# Altium PCB ver_3.PcbDoc
Units mm, origin at the board's own origin, x right, y up, seen from the top; angles counter-clockwise.
Board outline 72 x 119 mm, 2 copper layers (Top Layer, Bottom Layer); 60 components, 48 nets, 255 pads, 36 vias.
Unrouted connection lines stored in the file: 4.
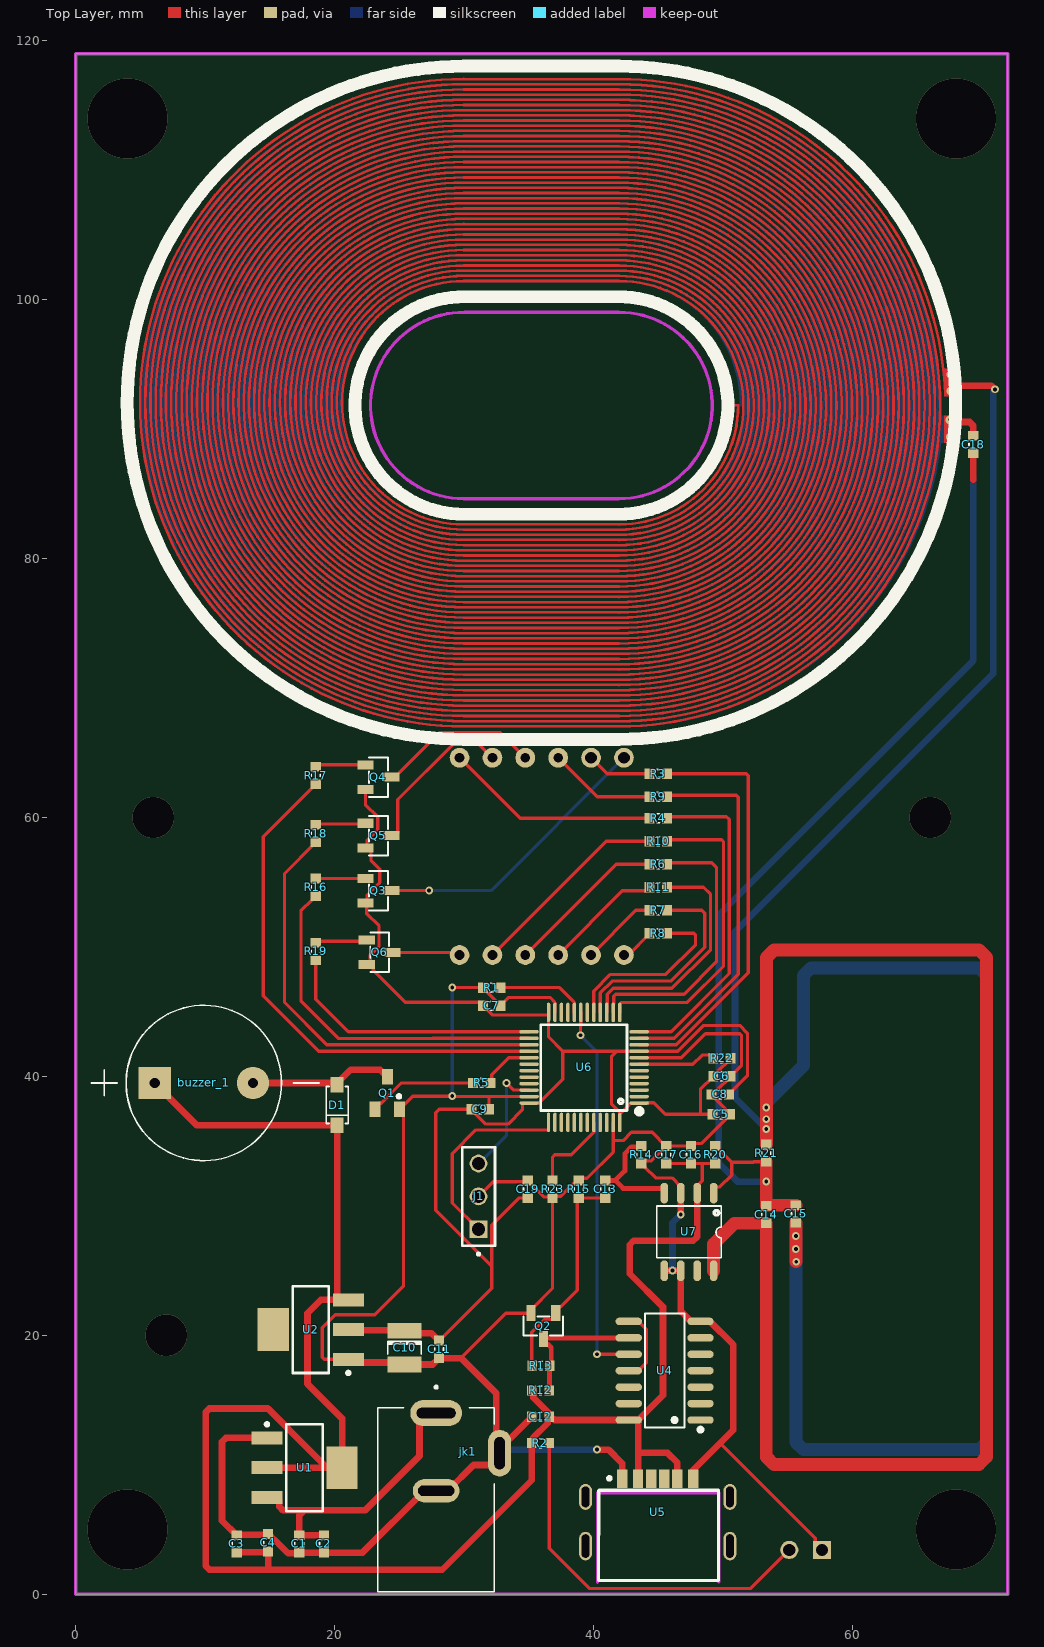
[diagram p0: Top Layer view]
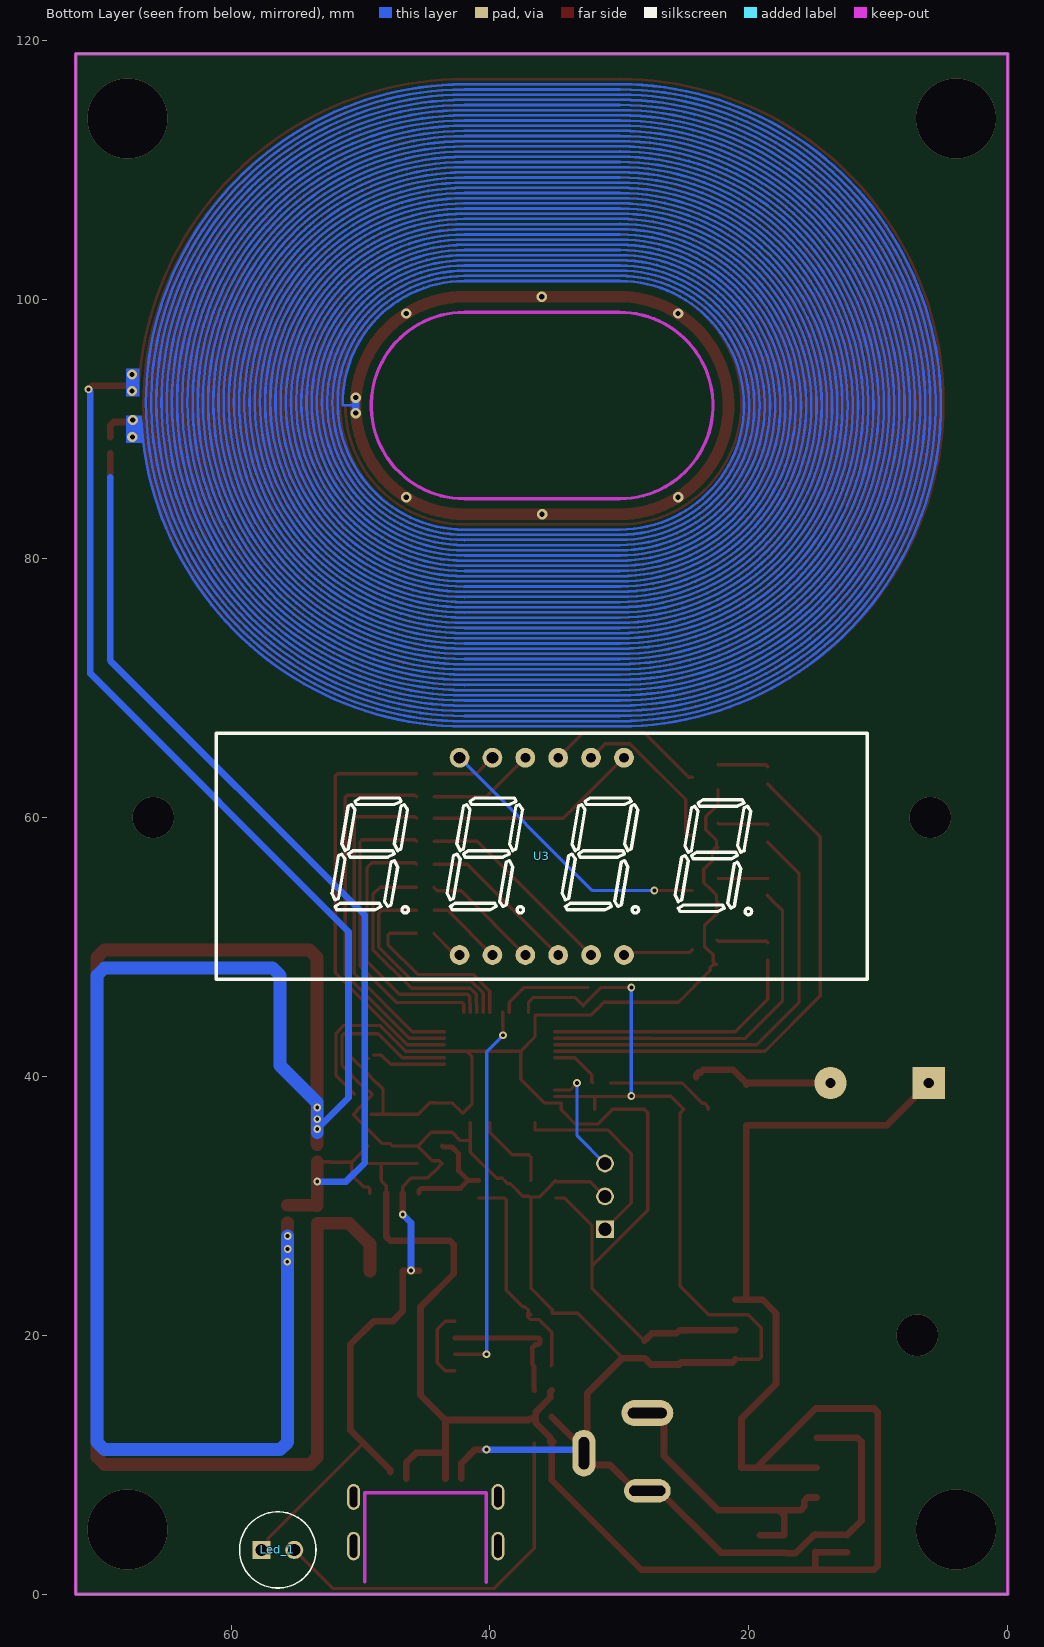
[diagram p1: Bottom Layer view, seen from below]
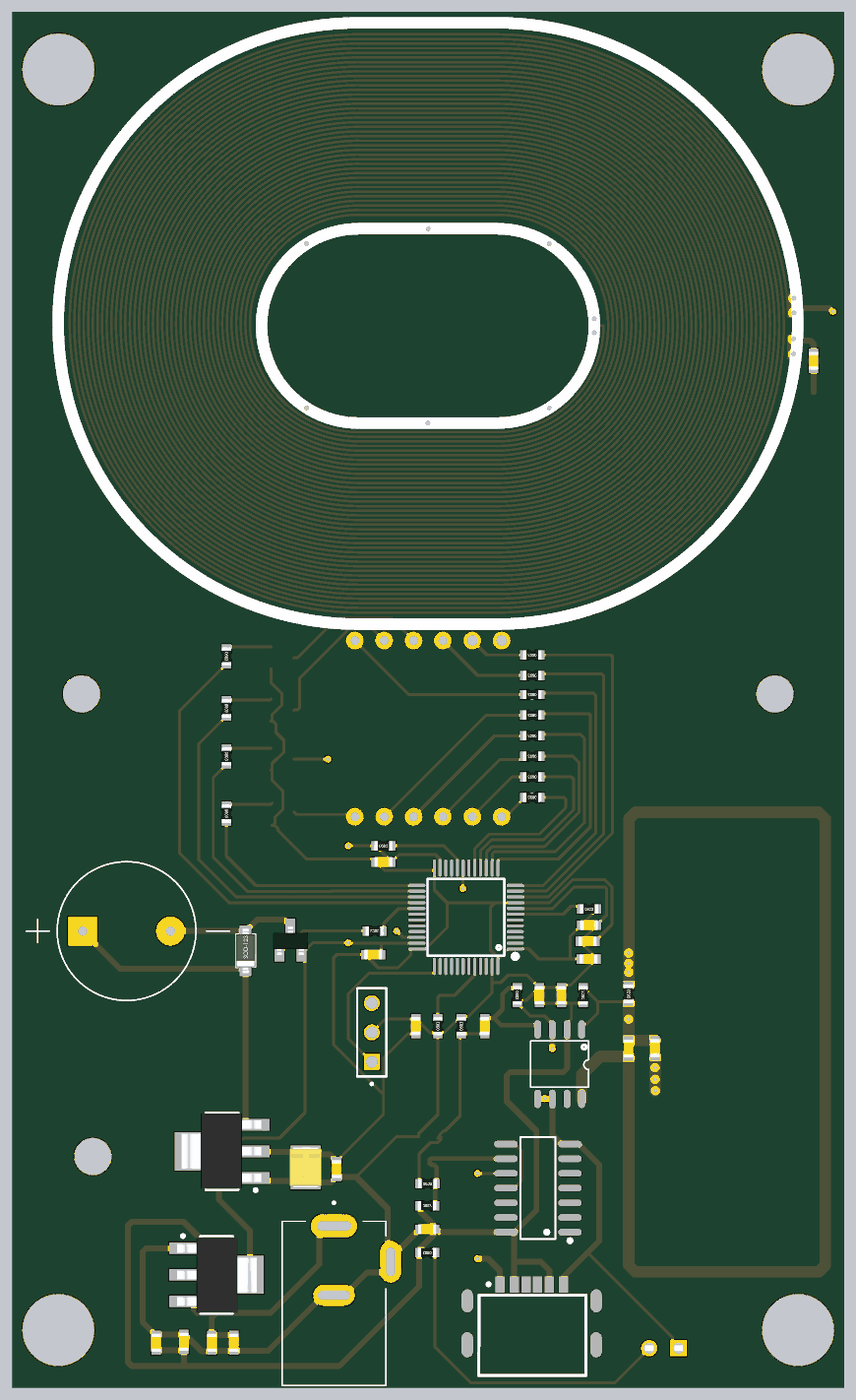
[diagram p2: 3D render of the assembled board from above, using the file's embedded part models]

## Layer stack, top to bottom
Top Solder: solder mask 0.0102, Solder Resist, Dk 3.5
Top Layer: signal copper 0.0356
Dielectric 1: dielectric 0.32, FR-4, Dk 4.8
Bottom Layer: signal copper 0.0356
Bottom Solder: solder mask 0.0102, Solder Resist, Dk 3.5

## Board outline
0,0 72,0 72,118.999 0,119

## Design rules (kind name [scope] priority, off if disabled: settings)
Clearance [All] p1: gap=0.2 ignorepadtopadclearanceinfootprint=FALSE
PolygonConnect [All] p1: connectstyle=Relief reliefconductorwidth=0.254 reliefentries=4 polygonreliefangle="90 Angle" airgapwidth=0.254
RoutingVias [All] p1: holewidth=0.711 width=1.27 viastyle="Through Hole" minholewidth=0.3 minwidth=0.6 maxholewidth=0.3 maxwidth=0.6
SolderMaskExpansion [All] p1: expansion=0.102 istentingtop=FALSE
Width [All] p1: maxlimit=1 minlimit=0.254 preferedwidth=0.508
30 further rules are at their usual default settings.

## Components (designator, comment, footprint, x,y, rotation, side; value= is the part's Value field where it differs from the comment)
buzzer_1 "buzzer_12mm" buzzer_12mm 9.896,39.497 r0 top
C1 "10uF" CN-SMD-0603 17.272,3.897 r90 top
C2 "100nF" CN-SMD-0603 19.177,3.897 r90 top
C3 "10uF" CN-SMD-0603 12.446,3.897 r270 top
C4 "100uF" CN-SMD-0603 14.859,3.977 r270 top
C5 "104" CN-SMD-0603 49.871,37.084 r0 top
C6 "104" CN-SMD-0603 49.911,40.005 r0 top
C7 "104" CN-SMD-0603 32.131,45.466 r180 top
C8 "104" CN-SMD-0603 49.784,38.608 r180 top
C9 "104" CN-SMD-0603 31.242,37.465 r180 top
C10 "226J" C_Tanta_3528 25.4,19.05 r270 top
C11 "10uF" CN-SMD-0603 28.067,18.923 r90 top
C12 "104" CN-SMD-0603 35.901,13.716 r0 top
C13 "150pF" CN-SMD-0603 40.894,31.282 r90 top
C14 "100pF" CN-SMD-0603 53.34,29.337 r90 top
C15 "1nF" CN-SMD-0603 55.626,29.377 r90 top
C16 "104" CN-SMD-0603 47.524,33.949 r270 top
C17 "104" CN-SMD-0603 45.619,33.949 r270 top
C18 "1nF" CN-SMD-0603 69.342,88.813 r270 top
C19 "104" CN-SMD-0603 34.925,31.282 r90 top
D1 "1N4148" SOD-123 20.153,37.735 r270 top value=1N4007
J1 "JP3x1" JP3x1 31.115,26.289 r90 top
jk1 "jack dc" "jack dc" 27.843,14.001 r270 top
Led_1 "led_5mm" led_5mm 56.388,3.429 r180 bottom
Q1 "AO3400" SOT23B 24.073,38.72 r0 top value=C1815
Q2 "J3Y" j3y -385.435,-409.879 r90 top
Q3 "2TY" 2TY 453.981,-367.208 r180 top
Q4 "2TY" 2TY 453.981,-358.445 r180 top
Q5 "2TY" 2TY 453.981,-362.956 r180 top
Q6 "2TY" 2TY 454.075,-371.973 r180 top
R1 "10K" RES-SMD-0603 32.131,46.863 r0 top value="R1/4W - 1K"
R2 "1K" RES-SMD-0603 35.901,11.684 r180 top value="R1/4W - 1K"
R3 "330" RES-SMD-0603 44.998,63.373 r180 top value="R1/4W - 1K"
R4 "330" RES-SMD-0603 44.998,59.944 r180 top value="R1/4W - 1K"
R5 "1K" RES-SMD-0603 31.369,39.497 r180 top value="R1/4W - 1K"
R6 "330" RES-SMD-0603 44.998,56.388 r180 top value="R1/4W - 1K"
R7 "330" RES-SMD-0603 44.998,52.832 r180 top value="R1/4W - 1K"
R8 "330" RES-SMD-0603 44.998,51.054 r180 top value="R1/4W - 1K"
R9 "330" RES-SMD-0603 44.998,61.595 r180 top value="R1/4W - 1K"
R10 "330" RES-SMD-0603 44.998,58.166 r180 top value="R1/4W - 1K"
R11 "330" RES-SMD-0603 44.998,54.61 r180 top value="R1/4W - 1K"
R12 "2.2K" RES-SMD-0603 35.901,15.748 r0 top value="R1/4W - 1K"
R13 "6.8K" RES-SMD-0603 35.941,17.653 r0 top value="R1/4W - 1K"
R14 "1K" RES-SMD-0603 43.688,33.949 r270 top value="R1/4W - 1K"
R15 "2.2K" RES-SMD-0603 38.862,31.282 r90 top value="R1/4W - 1K"
R16 "330" RES-SMD-0603 18.542,54.61 r270 top value="R1/4W - 1K"
R17 "330" RES-SMD-0603 18.542,63.246 r270 top value="R1/4W - 1K"
R18 "330" RES-SMD-0603 18.542,58.761 r270 top value="R1/4W - 1K"
R19 "330" RES-SMD-0603 18.542,49.657 r270 top value="R1/4W - 1K"
R20 "47K" RES-SMD-0603 49.403,33.949 r90 top value="R1/4W - 1K"
R21 "1K5" RES-SMD-0603 53.34,34.076 r90 top value="R1/4W - 1K"
R22 "4.7K" RES-SMD-0603 49.911,41.402 r0 top value="R1/4W - 1K"
R23 "47K" RES-SMD-0603 36.83,31.282 r90 top value="R1/4W - 1K"
U1 "AMS1117" AMS1117-SOT223 17.674,9.779 r0 top
U2 "AMS1117" AMS1117-SOT223 18.161,20.447 r180 top
U3 "7seg4_5461AS-1_1" 7seg4_5461AS-1 36,57 r180 bottom
U4 "SN74HC14DRG4" 74HC14 45.491,17.161 r90 top
U5 "USB-TYPE-C-6-PIN-CONG" USB-TYPE-C-6-PIN-CONG 44.958,5.207 r0 top
U6 "STM32F103C8T6" LQFP-48_L7.0-W7.0-P0.50-LS9.0-BL 39.271,40.699 r90 top
U7 "MC12079" MC12079 47.371,27.988 r180 top

## Footprints (in the part's own frame and the unit in brackets; to place one, negate y for a bottom-side part, rotate by r counter-clockwise, add the part's x,y. Pads: shape width x height; smd on the part's side, far side on the other; paste and mask are expansions set on the pad)
2TY [mm]
  rect 1.25x0.7 smd paste+0 mask+0.051: 1(431.596,-422.514) 2(431.596,-420.614) 3(429.597,-421.564)
  silkscreen extent 429.87,-423.09 431.32,-420.04
7seg4_5461AS-1 [mil]
  round 60 hole 30 paste+0 mask+2: 1(-250,-300) 2(-150,-300) 3(-50,-300) 4(50,-300) 5(150,-300) 6(250,-300) 7(250,300) 8(150,300) 9(50,300) 10(-50,300)
  round 60 hole 36 paste+0 mask+2: 11(-150,300) 12(-250,300)
  silkscreen extent -990,-374 990,374
74HC14 [mm]
  oval 0.574x2.038 smd paste+0 mask+0.051: 1(-3.699,-2.769) 2(-2.429,-2.769) 3(-1.159,-2.769) 4(0.111,-2.769) 5(1.381,-2.769) 6(2.651,-2.769) 7(3.921,-2.769) 8(3.921,2.769) 9(2.651,2.769) 10(1.381,2.769) 11(0.111,2.769) 12(-1.159,2.769) 13(-2.429,2.769) 14(-3.699,2.769)
  silkscreen extent -4.59,-2.92 4.51,1.52
AMS1117-SOT223 [mm]
  rect 2.4x1 smd: 1(-2.9,2.3) 2(-2.9,0) 3(-2.9,-2.3)
  rect 2.4x3.3 smd: 2(2.9,0)
  silkscreen extent -3.02,-3.35 1.4,3.47, body extent -3.39,-3.27 3.5,3.23, height 1.72
buzzer_12mm [mm]
  round 2.5 hole 0.8: N(3.8,0)
  rect 2.5x2.5 / inner round 2.5 / far side rect 2.5x2.5 hole 0.8: P(-3.8,0)
  silkscreen extent -8.69,-6 8.92,6
C_Tanta_3528 [mm]
  rect 1.2x2.6 smd: 1(-1.3,0) 2(1.3,0)
  silkscreen extent -0.56,-1.3 0.51,1.3, body extent -1.75,-1.4 1.71,1.4, height 1.94
CN-SMD-0603 [mm]
  round 0.254 on Mech15: 0(0,0)
  rect 0.75x0.8 smd: 1(-0.675,0) 2(0.675,0)
  silkscreen extent -0.1,-0.34 0.1,0.34, body extent -0.8,-0.43 0.8,0.43, height 0.8
j3y [mm]
  rect 1.25x0.7 smd paste+0 mask+0.051: 1(431.596,-422.514) 2(431.596,-420.614) 3(429.597,-421.564)
  silkscreen extent 429.87,-423.09 431.32,-420.04
"jack dc" [mm]
  oval 2x4 hole 0.8 slot 3 at 90 deg: 1(0,0)
  oval 1.8x3.6 hole 0.8 slot 2.8 at 90 deg: 2(6,0)
  oval 3.6x1.8 hole 0.8 slot 2.5 at 0 deg: 3(3.1,4.9)
  silkscreen extent -2.1,-4.5 13.8,4.5
JP3x1 [mm]
  rect 1.37x1.37 hole 1.02: 01(1.905,0)
  round 1.37 hole 1.02: 02(4.445,0) 03(6.985,0)
  silkscreen extent -0.11,-1.27 8.25,1.27
led_5mm [mm]
  round 1.4 hole 0.93: A(1.27,0)
  rect 1.4x1.4 / inner round 1.4 / far side rect 1.4x1.4 hole 0.93: C(-1.27,0)
  silkscreen extent -2.95,-2.95 2.95,2.95, body extent -2.5,-2.95 2.95,2.95, height 9.6
LQFP-48_L7.0-W7.0-P0.50-LS9.0-BL [mm]
  oval 0.27x1.5 smd paste+0 mask+0.05: 1(-2.75,-4.25) 2(-2.25,-4.25) 3(-1.75,-4.25) 4(-1.25,-4.25) 5(-0.75,-4.25) 6(-0.25,-4.25) 7(0.25,-4.25) 8(0.75,-4.25) 9(1.25,-4.25) 10(1.75,-4.25) 11(2.25,-4.25) 12(2.75,-4.25) 25(2.75,4.25) 26(2.25,4.25) 27(1.75,4.25) 28(1.25,4.25) 29(0.75,4.25) 30(0.25,4.25) 31(-0.25,4.25) 32(-0.75,4.25) 33(-1.25,4.25) 34(-1.75,4.25) 35(-2.25,4.25) 36(-2.75,4.25)
  oval 1.5x0.27 smd paste+0 mask+0.05: 13(4.25,-2.75) 14(4.25,-2.25) 15(4.25,-1.75) 16(4.25,-1.25) 17(4.25,-0.75) 18(4.25,-0.25) 19(4.25,0.25) 20(4.25,0.75) 21(4.25,1.25) 22(4.25,1.75) 23(4.25,2.25) 24(4.25,2.75) 37(-4.25,2.75) 38(-4.25,2.25) 39(-4.25,1.75) 40(-4.25,1.25) 41(-4.25,0.75) 42(-4.25,0.25) 43(-4.25,-0.25) 44(-4.25,-0.75) 45(-4.25,-1.25) 46(-4.25,-1.75) 47(-4.25,-2.25) 48(-4.25,-2.75)
  silkscreen extent -3.59,-4.46 3.3,3.34, body extent -4.5,-4.5 4.5,4.5, height 1.5
MC12079 [mm]
  oval 0.6x1.6 smd paste+0 mask+0.051: 1(-1.905,-3) 2(-0.635,-3) 3(0.635,-3) 4(1.905,-3) 5(1.905,3) 6(0.635,3) 7(-0.635,3) 8(-1.905,3)
  silkscreen extent -2.5,-2 2.5,2
RES-SMD-0603 [mm]
  round 0.254 on Mech15: 0(0,0)
  rect 0.75x0.8 smd: 1(-0.675,0) 2(0.675,0)
  silkscreen extent -0.1,-0.34 0.1,0.34, body extent -0.8,-0.4 0.8,0.4, height 0.43
SOD-123 [mm]
  rect 1.2x1 smd: 1(-1.635,0.04) 2(1.515,0.04)
  silkscreen extent -1.48,-0.81 1.37,0.89, body extent -1.98,-0.81 1.87,0.89, height 1.43
SOT23B [mm]
  rect 0.85x1.2 smd: 1(0.946,-1.255) 2(0.006,1.24) 3(-0.944,-1.26)
  silkscreen extent 0.77,-0.39 1.02,-0.14, body extent -1.49,-1.31 1.51,1.19, height 1.06
USB-TYPE-C-6-PIN-CONG [mm]
  oval 1x2.2 hole 0.6 slot 1.8 at 90 deg paste+0 mask+0.051: 7(-5.575,-1.482) 8(5.575,-1.482)
  oval 1x2 hole 0.6 slot 1.6 at 90 deg paste+0 mask+0.051: 7(-5.575,2.318) 8(5.575,2.318)
  rect 0.8x1.4 smd paste-100 mask+0.051: A5(-0.5,3.718) A9(1.52,3.718) A12(2.75,3.718) B5(0.5,3.718) B9(-1.52,3.718) B12(-2.75,3.718)
  Keep-Out Layer lines w0.254: -4.66,-4.291 -4.66,2.649 -4.455,2.649 4.715,2.649 4.715,-4.251
  silkscreen extent -4.58,-4.14 4.69,3.88

## Part data
C1 C2 C3 C4 C11: library part "CAP 104"
C5 C6 C7 C8 C9 C12 C13 C14 C15 C16 C17 C18 C19: library part "Tu 0805_1", "Tu 0805", Bottom=10, Right=20
C10: library part "CAP POL"
D1: library part D1A, "Diode 1A"
Q1: library part C1815, "NPN 600mW, ECB"
Q2: library part S8050/J3Y/0.4
R1 R12 R13 R14 R15 R20 R21 R22 R23: library part "Tro 0805_1", "Tro 0805"
R2 R3 R4 R5 R6 R7 R8 R9 R10 R11 R16 R17 R18 R19: library part Res, "Resistor 1/4W"
U6: library part APM32F030C8T6

## Via types
v1: diameter 0.6, hole 0.3, Top Layer to Bottom Layer, 17 vias
v2: diameter 0.8, hole 0.4, Top Layer to Bottom Layer, 12 vias
v3: diameter 6.2, hole 6.2, Top Layer to Bottom Layer, 4 vias
v4: diameter 3.2, hole 3.2, Top Layer to Bottom Layer, 3 vias

## Nets (pads, with @x,y where several pads share a name; then routed paths per layer and width w, separated by ;. In a path a pad name is that pad's centre, name@x,y a point inside that pad or via, vN(x,y) a via of type N, cw(c..) or ccw(c..) an arc to the next point about the centre after c; other vN are vias at no path point)
3V3: C5.1 C6.1 C7.2 C8.1 C9.2 C10.1 C11.2 C19.1 Q3.2 Q4.2 Q5.2 Q6.2 R22.2 U2.2 U6.1 U6.9 U6.24 U6.36 U6.48 | length 123.7
  Top Layer w0.254: Q4.2 22.384,60.995 23.336,60.043 23.336,59.073 22.504,58.24 22.504,57.778 Q5.2 22.584,57.658 22.807,57.435 22.807,56.695 23.495,56.007 23.495,54.979 22.926,54.41 22.914,54.41 22.504,54 22.504,53.526 Q3.2 22.479,53.311 22.479,52.578 23.431,51.626 23.431,50.056 23.089,49.714 22.759,49.383 22.759,48.864 Q6.2@22.536,48.641 ; Q6.2 Q6.2@22.536,48.641 ; C11.2 28.092,19.598 32.127,23.633 32.127,25.35 ; C19.1 34.217,30.607 32.127,28.517 32.127,25.35 ; 42.018,37.22 41.392,37.846 41.392,41.558 41.783,41.949 ; U6.48@42.098,37.141 42.906,37.949 U6.1 44.14,37.949 44.164,37.973 44.664,37.973 45.553,37.084 48.26,37.084 ; C5.1 48.26,37.084 ; C8.1 50.459,38.633 51.889,40.063 51.889,43.346 51.293,43.942 48.514,43.942 46.521,41.949 U6.9 41.783,41.949 ; R22.2 50.586,41.377 49.487,40.278 49.484,40.278 49.236,40.03 C6.1 49.236,39.98 48.26,39.004 48.26,37.084 ; Q6.2@22.536,48.641 22.754,48.641 22.977,48.418 22.977,48.2 25.438,45.739 31.208,45.739 31.456,45.491 C7.2 31.456,45.441 31.704,45.193 31.769,45.193 32.223,44.739 36.514,44.739 36.521,44.732 36.521,43.053 37.625,41.949 ; 32.127,25.35 31.026,26.45 27.813,29.664 27.813,37.189 28.089,37.465 C9.2 30.567,37.44 31.685,36.322 33.394,36.322 34.505,37.433 34.505,37.941 34.513,37.949 U6.36 35.024,37.952 35.792,37.952 37.625,39.785 37.625,41.949 ; 37.625,41.949 41.783,41.949
  Top Layer w0.508: U2.2@21.061,20.447 21.109,20.399 25.351,20.399 C10.1 25.572,20.178 27.462,20.178 27.921,19.719 27.946,19.719 C11.2
4A: Q2.3 R12.2 R13.2 U4.9 | length 11
  Top Layer w0.381: R12.2 36.596,15.768 R13.2@36.596,17.592 ; R13.2 36.735,17.772 36.735,19.059 36.512,19.283 36.289,19.283 36.129,19.442 Q2.3 36.224,19.812 U4.9
4Y: U4.8 U4.11 | length 5.8
  Top Layer w0.254: U4.11 43.454,17.272 44.068,17.886 44.068,20.468 43.454,21.082 U4.8
5V: buzzer_1.P C3.2 C4.2 C12.2 C16.2 C17.2 D1.2 R2.2 R12.1 R20.1 U1.2 U2.3 U4.14 U5.A9 U5.B9 U7.2 | length 161.6
  Top Layer w0.254: C12.2@36.455,13.837 C12.2 ; C17.2 C16.2 48.387,33.274 ; U7.2 48.006,31.556 48.387,31.937 48.387,33.274 ; R20.1 48.387,33.274
  Top Layer w0.508: buzzer_1.P 9.373,36.22 D1.2 20.193,22.993 U2.3@20.439,22.747 ; C3.2@12.406,3.262 C4.2@14.844,3.262 ; U1.2@14.774,9.779 U1.2@19.416,9.779 ; C4.2 14.859,2.032 14.732,1.905 ; U2.3 U2.3@20.439,22.747 ; R2.2@35.105,11.792 R2.2@35.226,11.913 ; R12.1 35.347,15.627 35.347,15.199 36.455,14.091 C12.2@36.455,13.837 ; C12.2 36.455,13.595 36.455,13.214 35.347,12.106 35.347,11.805 R2.2 35.226,8.81 28.321,1.905 14.732,1.905 ; C12.2@36.609,13.57 36.887,13.57 36.995,13.462 U4.14 U4.14@43.408,13.462 ; U5.B9 43.438,10.922 45.72,10.922 46.478,10.164 U5.A9 ; 43.438,10.795 43.438,13.432 U4.14@43.408,13.462 ; U7.2 48.006,27.603 47.708,27.305 43.097,27.305 42.799,27.007 42.799,24.765 45.364,22.2 45.364,15.372 43.454,13.462 U4.14@43.408,13.462 ; 14.732,1.905 10.331,1.905 10.033,2.203 10.033,14.053 10.331,14.351 14.844,14.351 17.993,11.202 U1.2@19.416,9.779 ; U1.2@19.416,9.779 20.574,9.779 20.574,13.589 17.907,16.256 17.907,21.717 18.937,22.747 20.193,22.747 U2.3@20.439,22.747
9V: C1.2 C2.2 jk1.1 U1.3 | length 22.4
  Top Layer w0.508: U1.3 15.474,7.479 15.72,7.233 15.72,6.775 16.018,6.477 17.653,6.477 ; C2.2 C1.2 17.272,6.096 17.653,6.477 ; jk1.1 27.247,14.001 26.558,13.312 26.558,10.683 22.352,6.477 17.653,6.477
A: R3.2 U3.11 | length 5
  Top Layer w0.254: U3.11 41.057,63.373 R3.2
B: R4.2 U3.7 | length 16.6
  Top Layer w0.254: U3.7 34.326,59.944 R4.2
BOOT0: R23.2 U6.44 | length 6.6
  Top Layer w0.254: R23.2@36.855,31.957 R23.2 36.83,33.763 37.014,33.947 38.288,33.947 40.018,35.678 40.018,36.446 U6.44
buzzer: R5.1 U6.29 | length 4.1
  Top Layer w0.254: R5.1 32.128,39.581 32.128,40.129 33.448,41.449 U6.29
C: R6.2 U3.4 | length 12.5
  Top Layer w0.254: U3.4 41.738,56.388 R6.2
D: R7.2 U3.2 | length 5.9
  Top Layer w0.254: U3.2 43.262,52.832 R7.2
DIG1: Q3.3 U3.12 | length 22.2
  Top Layer w0.254: Q3.3 v1(27.305,54.356)
  Bottom Layer w0.254: v1(27.305,54.356) 32.086,54.356 U3.12
DIG2: Q4.3 U3.9 | length 12.6
  Top Layer w0.254: Q4.3 24.659,63.119 28.088,66.548 32.802,66.548 U3.9
DIG3: Q5.3 U3.8 | length 12.7
  Top Layer w0.254: Q5.3 24.659,58.608 24.882,58.831 24.882,61.392 29.199,65.709 31.101,65.709 U3.8
DIG4: Q6.3 U3.6 | length 5.4
  Top Layer w0.254: Q6.3@24.384,49.784 24.586,49.582 29.448,49.582 U3.6
DP: R11.2 U3.3 | length 9.2
  Top Layer w0.254: U3.3 42.227,54.337 44.075,54.337 44.323,54.585 R11.2
E: R8.2 U3.1 | length 2.7
  Top Layer w0.254: U3.1 42.674,49.38 44.323,51.029 R8.2
F: R9.2 U3.10 | length 8.3
  Top Layer w0.254: U3.10 40.295,61.595 R9.2
G: R10.2 U3.5 | length 15.8
  Top Layer w0.254: U3.5 40.976,58.166 R10.2
GND: C1.1 C2.1 C3.1 C4.1 C5.2 C6.2 C7.1 C8.2 C9.1 C10.2 C11.1 C12.1 C16.1 C17.1 C19.2 J1.02 jk1.2 jk1.3 Led_1.C Q1.1 Q2.2 R1.1 R14.2 R15.2 R23.1 U1.1 U2.1 U4.7 U5.A12 U5.B12 U6.8 U6.23 U6.35 U6.47 U7.3 U7.5 U7.6 | length 226.8
  Top Layer w0.254: U2.1 21.047,18.161 19.199,18.161 19.05,18.31 19.05,20.598 20.042,21.59 23.114,21.59 25.317,23.793 25.317,37.167 Q1.1 26.035,38.481 v1(29.083,38.481) ; v1(29.083,46.863) R1.1 ; v1@29.115,38.449 U6.35 ; 29.758,18.248 33.227,21.717 Q2.2 35.179,21.992 36.83,23.643 R23.1 ; J1.02 32.258,31.877 34.845,31.877 C19.2 34.95,31.957 35.198,31.709 35.198,31.684 36.198,30.684 36.753,30.684 R23.1 ; R1.1@31.456,46.838 31.704,46.59 31.707,46.59 C7.1@32.806,45.491 ; C9.1 31.917,38.378 ; jk1.3@32.743,10.586 jk1.3 ; C7.1 C7.1@32.806,45.491 ; U6.23 37.018,44.952 37.018,45.72 36.637,46.101 33.441,46.101 33.079,45.739 33.054,45.739 C7.1@32.806,45.491 ; R15.2 38.614,31.709 38.414,31.709 37.462,30.758 36.981,30.758 R23.1 ; R15.2@39.033,32.128 39.494,32.128 41.524,34.158 41.524,35.045 ; U6.47 41.524,36.446 41.524,35.045 ; U6.8 46.783,41.449 48.641,43.307 51.286,43.307 51.435,43.158 51.435,40.879 50.586,40.03 C6.2 50.586,39.98 49.487,38.881 49.357,38.881 49.109,38.633 C8.2 49.109,38.583 50.298,37.394 50.298,37.307 50.546,37.059 48.305,34.819 47.719,34.819 C16.1 C17.1 C17.1@45.594,34.624 ; U7.3 46.736,31.488 46.065,32.159 44.803,32.159 43.961,33.001 43.961,33.026 43.713,33.274 R14.2 43.913,33.499 44.469,33.499 C17.1@45.594,34.624 ; 49.784,11.684 57.133,4.335 57.133,3.954 Led_1.C ; 41.524,35.045 42.284,35.045 42.926,35.687 44.531,35.687 C17.1@45.594,34.624
  Top Layer w0.508: C3.1@12.413,4.576 11.303,5.686 11.303,11.781 11.601,12.079 U1.1 ; C3.1@12.461,4.612 14.819,4.612 C4.1 14.884,4.652 15.364,4.172 15.406,4.172 16.408,3.17 17.126,3.17 17.178,3.222 C1.1 C2.1 22.164,3.222 26.943,8.001 jk1.2 28.743,8.001 30.731,9.989 32.146,9.989 jk1.3@32.743,10.586 ; U2.1 21.301,17.907 25.243,17.907 C10.2 27.569,17.75 27.921,18.102 27.921,18.127 28.042,18.248 C11.1 29.758,18.248 32.496,15.51 jk1.3@32.496,11.451 ; jk1.3 32.743,11.451 33.34,12.048 33.583,12.048 35.226,13.691 C12.1 ; v1(40.259,11.176) 41.148,11.176 42.208,10.116 U5.B12 ; U7.5 46.101,24.988 U7.6 46.736,21.874 47.528,21.082 U4.7 48.992,21.082 50.786,19.288 50.786,12.686 49.784,11.684 47.708,9.608 U5.A12@47.708,9.433 ; v1(46.736,29.337) U7.3
  Bottom Layer w0.254: v1(29.083,38.481) v1(29.083,46.863)
  Bottom Layer w0.508: jk1.3 33.018,11.176 v1@40.386,11.176 ; v1(46.101,25.019) 46.101,28.702 v1(46.736,29.337)
Netbuzzer_1_N: buzzer_1.N D1.1 Q1.2 | length 11.2
  Top Layer w0.508: buzzer_1.N D1.1@20.193,39.497 ; D1.1 20.193,39.47 21.236,40.513 23.526,40.513 23.733,40.306 23.908,40.306 24.079,40.135 Q1.2
NetC13_1: C13.1 Q2.1 R13.1 R15.1 | length 17.2
  Top Layer w0.254: R13.1 35.266,17.678 35.251,17.668 35.245,17.674 35.226,17.71 35.226,20.252 36.193,21.219 36.856,21.219 37.079,21.442 Q2.1 ; Q2.1@36.837,21.597 37.018,21.778 37.018,21.931 37.302,22.215 37.455,22.215 38.735,23.495 38.735,30.48 R15.1 C13.1
NetC14_1: C14.1 C15.1 C18.1 R21.2 U7.8 | length 182.3
  Top Layer w1: U7.8 49.276,27.051 50.887,28.662 C14.1 53.34,10.619 53.926,10.033 69.772,10.033 70.358,10.619 70.358,11.811 70.358,49.198 69.772,49.784 53.955,49.784 53.369,49.198 53.369,37.592 53.369,36.703 53.369,35.941 53.369,34.78 R21.2 ; v1@55.626,25.691 v1(55.626,26.67) v1(55.626,27.686) C15.1
  Bottom Layer w0.508: v1(53.34,35.941) 50.927,38.354 50.927,51.181 70.866,71.12 70.866,92.902 71.011,93.048 v1(71.011,93.073)
  other v1: 55.658,25.691 53.34,36.703 53.34,37.592
NetC14_2: C14.2 C15.2 C18.2 R20.2 R21.1 U7.1 | length 80.7
  Top Layer w0.254: U7.1 49.276,31.306 49.436,31.466 49.754,31.466 50.673,32.385 50.673,33.379 ; R20.2 49.428,34.624 50.673,33.379 ; R21.1 52.349,33.401 52.327,33.379 50.673,33.379
  Top Layer w0.508: 69.342,86.106 C18.2
  Top Layer w1: R21.1 v1(53.34,31.877) C14.2 53.38,30.052 C15.2
  Bottom Layer w0.508: v1(53.34,31.877) 51.12,31.877 49.657,33.34 49.657,52.451 69.342,72.136 69.342,86.276
Netled_1_A: Led_1.A R2.1 | length 29.2
  Top Layer w0.254: R2.1 36.576,3.556 39.678,0.454 52.143,0.454 Led_1.A
NetQ1_3: Q1.3 R5.2 | length 8.5
  Top Layer w0.254: Q1.3 23.129,37.635 23.427,37.933 23.602,37.933 25.167,39.497 R5.2
NetQ3_1: Q3.1 R16.1 | length 3.9
  Top Layer w0.254: R16.1 18.553,55.296 22.374,55.296 Q3.1
NetQ4_1: Q4.1 R17.1 | length 3.9
  Top Layer w0.254: R17.1 18.69,64.069 Q4.1
NetQ5_1: Q5.1 R18.1 | length 3.9
  Top Layer w0.254: R18.1 18.603,59.497 22.323,59.497 Q5.1
NetQ6_1: Q6.1 R19.1 | length 4
  Top Layer w0.254: R19.1 18.647,50.437 22.374,50.437 Q6.1
NRST: R22.1 U6.7 | length 5.8
  Top Layer w0.254: U6.7 47.68,40.949 48.387,41.656 R22.1@48.982,41.656 ; R22.1@49.368,41.383 R22.1@49.409,41.383
OUT: C13.2 R14.1 U7.4 | length 9
  Top Layer w0.381: C13.2 40.906,31.969 41.675,31.969 ; R14.1 43.611,34.547 42.929,34.547 42.418,34.036 42.418,32.712 41.675,31.969 ; U7.4 45.466,31.201 45.306,31.361 42.283,31.361 41.675,31.969
PA0: R3.1 U6.10 | length 32.3
  Top Layer w0.254: U6.10 46.379,42.449 51.943,48.013 51.943,63.224 51.794,63.373 R3.1
PA1: R9.1 U6.11 | length 29
  Top Layer w0.254: U6.11 46.237,42.949 51.181,47.893 51.181,61.573 51.032,61.722 45.8,61.722 R9.1
PA2: R4.1 U6.12 | length 25.7
  Top Layer w0.254: U6.12 45.989,43.449 50.492,47.952 50.492,59.849 50.27,60.071 45.8,60.071 R4.1
PA3: R10.1 U6.13 | length 24
  Top Layer w0.254: U6.13 42.021,45.563 42.178,45.72 47.244,45.72 50.038,48.514 50.038,58.144 49.889,58.293 45.8,58.293 R10.1
PA4: R6.1 U6.14 | length 21.6
  Top Layer w0.254: U6.14 41.521,45.568 41.559,45.606 41.559,46.206 41.708,46.355 46.99,46.355 49.495,48.86 49.495,56.147 49.127,56.515 45.8,56.515 R6.1
PA5: R11.1 U6.15 | length 18.7
  Top Layer w0.254: U6.15 41.021,45.568 41.059,45.606 41.059,46.348 41.52,46.809 46.054,46.809 49.041,49.796 49.041,54.061 48.492,54.61 R11.1
PA6: R7.1 U6.16 | length 16.7
  Top Layer w0.254: U6.16 40.521,46.452 41.44,47.371 45.974,47.371 48.587,49.984 48.587,52.61 48.365,52.832 R7.1
PA7: R8.1 U6.17 | length 14
  Top Layer w0.254: U6.17 40.021,46.594 41.306,47.879 45.593,47.879 47.879,50.165 47.879,50.905 47.73,51.054 R8.1
PB0: R17.2 U6.28 | length 40.4
  Top Layer w0.254: R17.2 18.517,62.571 18.269,62.323 18.269,62.298 14.478,58.507 14.478,46.228 18.757,41.949 U6.28
PB1: U4.10 U6.19 | length 29.4
  Top Layer w0.254: v1(38.989,43.18) 38.989,43.861 39.018,43.89 39.018,44.946 U6.19 ; v1(40.259,18.542) U4.10 U4.10@42.714,18.55
  Bottom Layer w0.254: v1(38.989,43.18) 40.259,41.91 v1(40.259,18.542)
PB2: R1.2 U6.20 | length 7.3
  Top Layer w0.254: R1.2@32.437,46.863 37.375,46.863 38.518,45.72 38.518,44.952 U6.20
PC13: R19.2 U6.25 | length 20.5
  Top Layer w0.254: R19.2 18.542,45.974 21.067,43.449 U6.25
PC14: R16.2 U6.26 | length 27.5
  Top Layer w0.254: R16.2@18.597,53.99 18.572,53.99 18.269,53.687 18.269,53.662 17.399,52.792 17.399,45.847 20.32,42.926 27.54,42.926 27.563,42.949 U6.26
PC15: R18.2 U6.27 | length 33.6
  Top Layer w0.254: R18.2 16.129,55.673 16.129,45.72 19.4,42.449 U6.27
SWCLK: J1.01 U6.37 | length 15.5
  Top Layer w0.254: J1.01 29.083,30.226 29.083,34.036 30.915,35.868 36.513,35.868 36.521,35.875 U6.37
SWDIO: J1.03 U6.34 | length 9.1
  Top Layer w0.254: v1(33.274,39.497) 33.819,38.952 35.018,38.952 U6.34
  Bottom Layer w0.254: J1.03 33.274,35.433 v1(33.274,39.497)
pads on no net: C1.0 C2.0 C3.0 C4.0 C5.0 C6.0 C7.0 C8.0 C9.0 C11.0 C12.0 C13.0 C14.0 C15.0 C16.0 C17.0 C18.0 C19.0 R1.0 R2.0 R3.0 R4.0 R5.0 R6.0 R7.0 R8.0 R9.0 R10.0 R11.0 R12.0 R13.0 R14.0 R15.0 R16.0 R17.0 R18.0 R19.0 R20.0 R21.0 R22.0 R23.0 U4.1 U4.2 U4.3 U4.4 U4.5 U4.6 U4.12 U4.13 U5.7 U5.8 U5.A5 U5.B5 U6.2 U6.3 U6.4 U6.5 U6.6 U6.18 U6.21 U6.22 U6.30 U6.31 U6.32 U6.33 U6.38 U6.39 U6.40 U6.41 U6.42 U6.43 U6.45 U6.46 U7.7
copper on no net: | length 10611.4
  Top Layer w0.203: 29.975,101.442 ccw(c29.975,92.042) 29.975,82.642 41.966,82.642 ; 29.975,101.842 ccw(c29.975,92.042) 29.975,82.242 41.966,82.242 ; 29.975,102.242 ccw(c29.975,92.042) 29.975,81.842 41.966,81.842 ; 29.975,102.642 ccw(c29.975,92.042) 29.975,81.442 41.966,81.442 ; 29.975,103.042 ccw(c29.975,92.042) 29.975,81.042 41.966,81.042 ; 29.975,103.442 ccw(c29.975,92.042) 29.975,80.642 41.966,80.642 ; 29.975,103.842 ccw(c29.975,92.042) 29.975,80.242 41.966,80.242 ; 29.975,104.242 ccw(c29.975,92.042) 29.975,79.842 41.966,79.842 ; 29.975,104.642 ccw(c29.975,92.042) 29.975,79.442 41.966,79.442 ; 29.975,105.042 ccw(c29.975,92.042) 29.975,79.042 41.966,79.042 ; 29.975,105.442 ccw(c29.975,92.042) 29.975,78.642 41.966,78.642 ; 29.975,105.842 ccw(c29.975,92.042) 29.975,78.242 41.966,78.242 ; 29.975,106.242 ccw(c29.975,92.042) 29.975,77.842 41.966,77.842 ; 29.975,106.642 ccw(c29.975,92.042) 29.975,77.442 41.966,77.442 ; 29.975,107.042 ccw(c29.975,92.042) 29.975,77.042 41.966,77.042 ; 29.975,107.442 ccw(c29.975,92.042) 29.975,76.642 41.966,76.642 ; 29.975,107.842 ccw(c29.975,92.042) 29.975,76.242 41.966,76.242 ; 29.975,108.242 ccw(c29.975,92.042) 29.975,75.842 41.966,75.842 ; 29.975,108.642 ccw(c29.975,92.042) 29.975,75.442 41.966,75.442 ; 29.975,109.042 ccw(c29.975,92.042) 29.975,75.042 41.966,75.042 ; 29.975,109.442 ccw(c29.975,92.042) 29.975,74.642 41.966,74.642 ; 29.975,109.842 ccw(c29.975,92.042) 29.975,74.242 41.966,74.242 ; 29.975,110.242 ccw(c29.975,92.042) 29.975,73.842 41.966,73.842 ; 29.975,110.642 ccw(c29.975,92.042) 29.975,73.442 41.966,73.442 ; 29.975,111.042 ccw(c29.975,92.042) 29.975,73.042 41.966,73.042 ; 29.975,111.442 ccw(c29.975,92.042) 29.975,72.642 41.966,72.642 ; 29.975,111.842 ccw(c29.975,92.042) 29.975,72.242 41.966,72.242 ; 29.975,112.242 ccw(c29.975,92.042) 29.975,71.842 41.966,71.842 ; 29.975,112.642 ccw(c29.975,92.042) 29.975,71.442 41.966,71.442 ; 29.975,113.042 ccw(c29.975,92.042) 29.975,71.042 41.966,71.042 ; 29.975,113.442 ccw(c29.975,92.042) 29.975,70.642 41.966,70.642 ; 29.975,113.842 ccw(c29.975,92.042) 29.975,70.242 41.966,70.242 ; 29.975,114.242 ccw(c29.975,92.042) 29.975,69.842 41.966,69.842 ; 29.975,114.642 ccw(c29.975,92.042) 29.975,69.442 41.966,69.442 ; 29.975,115.042 ccw(c29.975,92.042) 29.975,69.042 41.966,69.042 ; 29.975,115.442 ccw(c29.975,92.042) 29.975,68.642 41.966,68.642 ; 29.975,115.842 ccw(c29.975,92.042) 29.975,68.242 41.966,68.242 ; 29.975,116.242 ccw(c29.975,92.042) 29.975,67.842 41.966,67.842 ; 29.975,116.642 ccw(c29.975,92.042) 29.975,67.442 41.966,67.442 ; 29.975,117.042 ccw(c29.975,92.042) 29.975,67.042 41.966,67.042 ; 29.98,101.437 41.971,101.437 cw(c41.971,91.837) 41.971,82.237 ; 29.98,101.837 41.971,101.837 cw(c41.971,91.837) 41.971,81.837 ; 29.98,102.237 41.971,102.237 cw(c41.971,91.837) 41.971,81.437 ; 29.98,102.637 41.971,102.637 cw(c41.971,91.837) 41.971,81.037 ; 29.98,103.037 41.971,103.037 ; 29.98,103.437 41.971,103.437 cw(c41.971,91.837) 41.971,80.237 ; 29.98,103.837 41.971,103.837 cw(c41.971,91.837) 41.971,79.837 ; 29.98,104.237 41.971,104.237 cw(c41.971,91.837) 41.971,79.437 ; 29.98,104.637 41.971,104.637 cw(c41.971,91.837) 41.971,79.037 ; 29.98,105.037 41.971,105.037 cw(c41.971,91.837) 41.971,78.637 ; 29.98,105.437 41.971,105.437 cw(c41.971,91.837) 41.971,78.237 ; 29.98,105.837 41.971,105.837 cw(c41.971,91.837) 41.971,77.837 ; 29.98,106.237 41.971,106.237 cw(c41.971,91.837) 41.971,77.437 ; 29.98,106.637 41.971,106.637 cw(c41.971,91.837) 41.971,77.037 ; 29.98,107.037 41.971,107.037 cw(c41.971,91.837) 41.971,76.637 ; 29.98,107.437 41.971,107.437 cw(c41.971,91.837) 41.971,76.237 ; 29.98,107.837 41.971,107.837 cw(c41.971,91.837) 41.971,75.837 ; 29.98,108.237 41.971,108.237 cw(c41.971,91.837) 41.971,75.437 ; 29.98,108.637 41.971,108.637 cw(c41.971,91.837) 41.971,75.037 ; 29.98,109.037 41.971,109.037 cw(c41.971,91.837) 41.971,74.637 ; 29.98,109.437 41.971,109.437 cw(c41.971,91.837) 41.971,74.237 ; 29.98,109.837 41.971,109.837 cw(c41.971,91.837) 41.971,73.837 ; 29.98,110.237 41.971,110.237 cw(c41.971,91.837) 41.971,73.437 ; 29.98,110.637 41.971,110.637 cw(c41.971,91.837) 41.971,73.037 ; 29.98,111.037 41.971,111.037 cw(c41.971,91.837) 41.971,72.637 ; 29.98,111.437 41.971,111.437 cw(c41.971,91.837) 41.971,72.237 ; 29.98,111.837 41.971,111.837 cw(c41.971,91.837) 41.971,71.837 ; 29.98,112.237 41.971,112.237 cw(c41.971,91.837) 41.971,71.437 ; 29.98,112.637 41.971,112.637 cw(c41.971,91.837) 41.971,71.037 ; 29.98,113.037 41.971,113.037 cw(c41.971,91.837) 41.971,70.637 ; 29.98,113.437 41.971,113.437 cw(c41.971,91.837) 41.971,70.237 ; 29.98,113.837 41.971,113.837 cw(c41.971,91.837) 41.971,69.837 ; 29.98,114.237 41.971,114.237 cw(c41.971,91.837) 41.971,69.437 ; 29.98,114.637 41.971,114.637 cw(c41.971,91.837) 41.971,69.037 ; 29.98,115.037 41.971,115.037 cw(c41.971,91.837) 41.971,68.637 ; 29.98,115.437 41.971,115.437 cw(c41.971,91.837) 41.971,68.237 ; 29.98,115.837 41.971,115.837 cw(c41.971,91.837) 41.971,67.837 ; 29.98,116.237 41.971,116.237 cw(c41.971,91.837) 41.971,67.437 ; 29.98,116.637 41.971,116.637 cw(c41.971,91.837) 41.971,67.037 ; 29.98,117.037 41.971,117.037 cw(c41.971,91.837) 67.159,92.613 ; 41.971,80.637 ccw(c41.971,91.837) 41.971,103.037 ; 41.971,82.637 ccw(c41.971,91.837) 51.171,91.837 50.371,91.837
  Top Layer w0.508: v2(67.596,90.709) 67.754,90.551 69.044,90.551 69.342,90.253 69.342,89.377 ; v2@67.875,92.945 67.875,93.361 70.723,93.361 71.011,93.073
  Top Layer w0.9: 29.973,83.427 cw(c29.973,91.827) 30.033,100.227 41.973,100.227 cw(c41.973,91.827) 41.973,83.427 29.973,83.427
  Bottom Layer w0.203: 29.975,101.442 ccw(c29.975,91.842) 29.975,82.242 41.966,82.242 ; 29.975,101.842 ccw(c29.975,91.842) 29.975,81.842 41.966,81.842 ; 29.975,102.242 ccw(c29.975,91.842) 29.975,81.442 41.966,81.442 ; 29.975,102.642 ccw(c29.975,91.842) 29.975,81.042 41.966,81.042 ; 29.975,103.042 ccw(c29.975,91.842) 29.975,80.642 41.966,80.642 ; 29.975,103.442 ccw(c29.975,91.842) 29.975,80.242 41.966,80.242 ; 29.975,103.842 ccw(c29.975,91.842) 29.975,79.842 41.966,79.842 ; 29.975,104.242 ccw(c29.975,91.842) 29.975,79.442 41.966,79.442 ; 29.975,104.642 ccw(c29.975,91.842) 29.975,79.042 41.966,79.042 ; 29.975,105.042 ccw(c29.975,91.842) 29.975,78.642 41.966,78.642 ; 29.975,105.442 ccw(c29.975,91.842) 29.975,78.242 41.966,78.242 ; 29.975,105.842 ccw(c29.975,91.842) 29.975,77.842 41.966,77.842 ; 29.975,106.242 ccw(c29.975,91.842) 29.975,77.442 41.966,77.442 ; 29.975,106.642 ccw(c29.975,91.842) 29.975,77.042 41.966,77.042 ; 29.975,107.042 ccw(c29.975,91.842) 29.975,76.642 41.966,76.642 ; 29.975,107.442 ccw(c29.975,91.842) 29.975,76.242 41.966,76.242 ; 29.975,107.842 ccw(c29.975,91.842) 29.975,75.842 41.966,75.842 ; 29.975,108.242 ccw(c29.975,91.842) 29.975,75.442 41.966,75.442 ; 29.975,108.642 ccw(c29.975,91.842) 29.975,75.042 41.966,75.042 ; 29.975,109.042 ccw(c29.975,91.842) 29.975,74.642 41.966,74.642 ; 29.975,109.442 ccw(c29.975,91.842) 29.975,74.242 41.966,74.242 ; 29.975,109.842 ccw(c29.975,91.842) 29.975,73.842 41.966,73.842 ; 29.975,110.242 ccw(c29.975,91.842) 29.975,73.442 41.966,73.442 ; 29.975,110.642 ccw(c29.975,91.842) 29.975,73.042 41.966,73.042 ; 29.975,111.042 ccw(c29.975,91.842) 29.975,72.642 41.966,72.642 ; 29.975,111.442 ccw(c29.975,91.842) 29.975,72.242 41.966,72.242 ; 29.975,111.842 ccw(c29.975,91.842) 29.975,71.842 41.966,71.842 ; 29.975,112.242 ccw(c29.975,91.842) 29.975,71.442 41.966,71.442 ; 29.975,112.642 ccw(c29.975,91.842) 29.975,71.042 41.966,71.042 ; 29.975,113.042 ccw(c29.975,91.842) 29.975,70.642 41.966,70.642 ; 29.975,113.442 ccw(c29.975,91.842) 29.975,70.242 41.966,70.242 ; 29.975,113.842 ccw(c29.975,91.842) 29.975,69.842 41.966,69.842 ; 29.975,114.242 ccw(c29.975,91.842) 29.975,69.442 41.966,69.442 ; 29.975,114.642 ccw(c29.975,91.842) 29.975,69.042 41.966,69.042 ; 29.975,115.042 ccw(c29.975,91.842) 29.975,68.642 41.966,68.642 ; 29.975,115.442 ccw(c29.975,91.842) 29.975,68.242 41.966,68.242 ; 29.975,115.842 ccw(c29.975,91.842) 29.975,67.842 41.966,67.842 ; 29.975,116.242 ccw(c29.975,91.842) 29.975,67.442 41.966,67.442 ; 29.975,116.642 ccw(c29.975,91.842) 29.975,67.042 41.966,67.042 ; 29.98,101.437 41.971,101.437 cw(c41.971,92.037) 51.37,91.873 ; 29.98,101.837 41.971,101.837 cw(c41.971,92.037) 41.971,82.237 ; 29.98,102.237 41.971,102.237 cw(c41.971,92.037) 41.971,81.837 ; 29.98,102.637 41.971,102.637 cw(c41.971,92.037) 41.971,81.437 ; 29.98,103.037 41.971,103.037 ; 29.98,103.437 41.971,103.437 cw(c41.971,92.037) 41.971,80.637 ; 29.98,103.837 41.971,103.837 cw(c41.971,92.037) 41.971,80.237 ; 29.98,104.237 41.971,104.237 cw(c41.971,92.037) 41.971,79.837 ; 29.98,104.637 41.971,104.637 cw(c41.971,92.037) 41.971,79.437 ; 29.98,105.037 41.971,105.037 cw(c41.971,92.037) 41.971,79.037 ; 29.98,105.437 41.971,105.437 cw(c41.971,92.037) 41.971,78.637 ; 29.98,105.837 41.971,105.837 cw(c41.971,92.037) 41.971,78.237 ; 29.98,106.237 41.971,106.237 cw(c41.971,92.037) 41.971,77.837 ; 29.98,106.637 41.971,106.637 cw(c41.971,92.037) 41.971,77.437 ; 29.98,107.037 41.971,107.037 cw(c41.971,92.037) 41.971,77.037 ; 29.98,107.437 41.971,107.437 cw(c41.971,92.037) 41.971,76.637 ; 29.98,107.837 41.971,107.837 cw(c41.971,92.037) 41.971,76.237 ; 29.98,108.237 41.971,108.237 cw(c41.971,92.037) 41.971,75.837 ; 29.98,108.637 41.971,108.637 cw(c41.971,92.037) 41.971,75.437 ; 29.98,109.037 41.971,109.037 cw(c41.971,92.037) 41.971,75.037 ; 29.98,109.437 41.971,109.437 cw(c41.971,92.037) 41.971,74.637 ; 29.98,109.837 41.971,109.837 cw(c41.971,92.037) 41.971,74.237 ; 29.98,110.237 41.971,110.237 cw(c41.971,92.037) 41.971,73.837 ; 29.98,110.637 41.971,110.637 cw(c41.971,92.037) 41.971,73.437 ; 29.98,111.037 41.971,111.037 cw(c41.971,92.037) 41.971,73.037 ; 29.98,111.437 41.971,111.437 cw(c41.971,92.037) 41.971,72.637 ; 29.98,111.837 41.971,111.837 cw(c41.971,92.037) 41.971,72.237 ; 29.98,112.237 41.971,112.237 cw(c41.971,92.037) 41.971,71.837 ; 29.98,112.637 41.971,112.637 cw(c41.971,92.037) 41.971,71.437 ; 29.98,113.037 41.971,113.037 cw(c41.971,92.037) 41.971,71.037 ; 29.98,113.437 41.971,113.437 cw(c41.971,92.037) 41.971,70.637 ; 29.98,113.837 41.971,113.837 cw(c41.971,92.037) 41.971,70.237 ; 29.98,114.237 41.971,114.237 cw(c41.971,92.037) 41.971,69.837 ; 29.98,114.637 41.971,114.637 cw(c41.971,92.037) 41.971,69.437 ; 29.98,115.037 41.971,115.037 cw(c41.971,92.037) 41.971,69.037 ; 29.98,115.437 41.971,115.437 cw(c41.971,92.037) 41.971,68.637 ; 29.98,115.837 41.971,115.837 cw(c41.971,92.037) 41.971,68.237 ; 29.98,116.237 41.971,116.237 cw(c41.971,92.037) 41.971,67.837 ; 29.98,116.637 41.971,116.637 ; 41.971,67.037 ccw(c41.971,92.037) 66.937,90.729 ; 41.971,81.037 ccw(c41.971,92.037) 41.971,103.037 ; 41.976,67.432 ccw(c41.976,92.032) 41.976,116.632 ; 50.371,91.837 51.371,91.837
  Bottom Layer w0.6: v2@50.371,91.337 v2@50.371,92.337
  Bottom Layer w1: 53.34,35.687 53.34,37.973 56.202,40.835 56.202,47.797 56.787,48.382 69.772,48.382 70.358,47.797 70.358,11.757 69.772,11.171 56.212,11.171 55.626,11.757 55.626,27.686
  other v2: 35.973,83.427 25.471,84.737 46.471,84.737 67.621,89.389 50.371,91.237 50.371,92.437 67.647,92.945 67.647,94.215 25.471,98.937 46.471,98.937 36.003,100.227
  other v3: 4,5 68,5 4,114 68,114
  other v4: 6.984,20 6,60 66,60

## Keep-outs
Keep-Out Layer:
  lines w0.254: 0,118.999 0,0 72,0 72,119 ; 0,119 72,118.999 ; 29.973,84.627 cw(c29.973,91.827) 30.024,99.027 41.973,99.027 cw(c41.973,91.827) 41.973,84.627 29.973,84.627

## Other copper
Top Layer:
  region: 68.129,94.697 67.063,94.697 67.063,92.538 68.129,92.538
  region: 68.129,91.065 67.071,91.065 67.071,88.931 68.129,88.931
Bottom Layer:
  region: 68.129,91.065 66.871,91.065 66.871,88.931 68.129,88.931
  region: 68.129,94.697 67.063,94.697 67.063,92.538 68.129,92.538

## Silkscreen, mask and mechanical layers (free items; w line width, h text height)
Top Overlay:
  lines w1: 29.973,83.427 cw(c29.973,91.827) 30.033,100.227 41.973,100.227 cw(c41.973,91.827) 41.973,83.427 29.973,83.427 ; 29.975,66.037 cw(c29.975,92.037) 29.975,118.037 41.971,118.037 cw(c41.971,92.037) 41.971,66.037 29.975,66.037